# Altium PCB PCB.PcbDoc
Units mm, origin at the board's own origin, x right, y up, seen from the top; angles counter-clockwise.
Board outline 118 x 31 mm, 2 copper layers (Top Layer, Bottom Layer); 24 components, 22 nets, 89 pads, 8 vias.
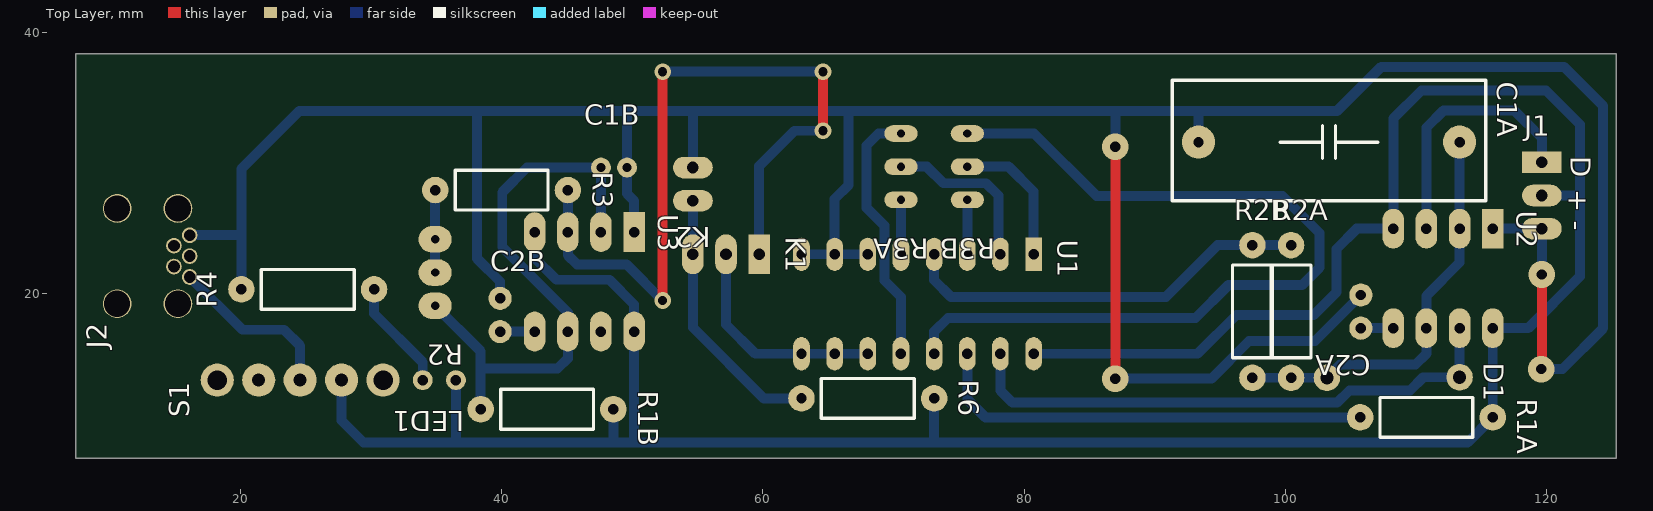
[diagram p0: Top Layer view]
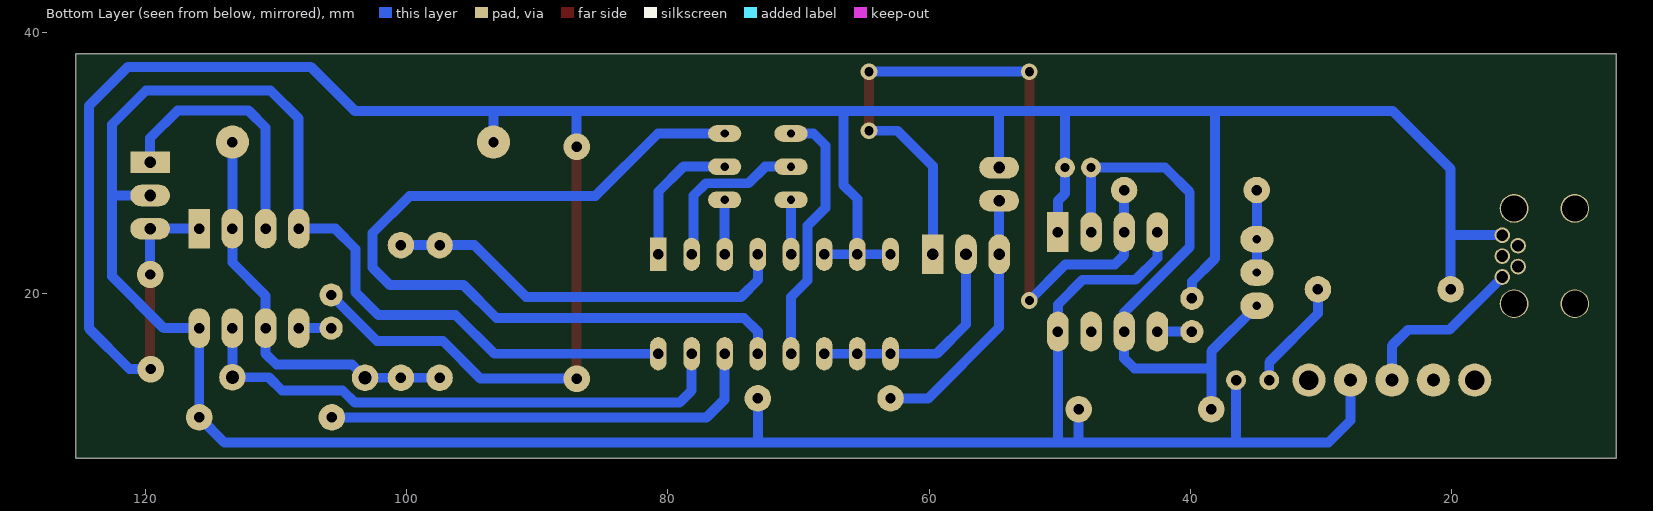
[diagram p1: Bottom Layer view, seen from below]
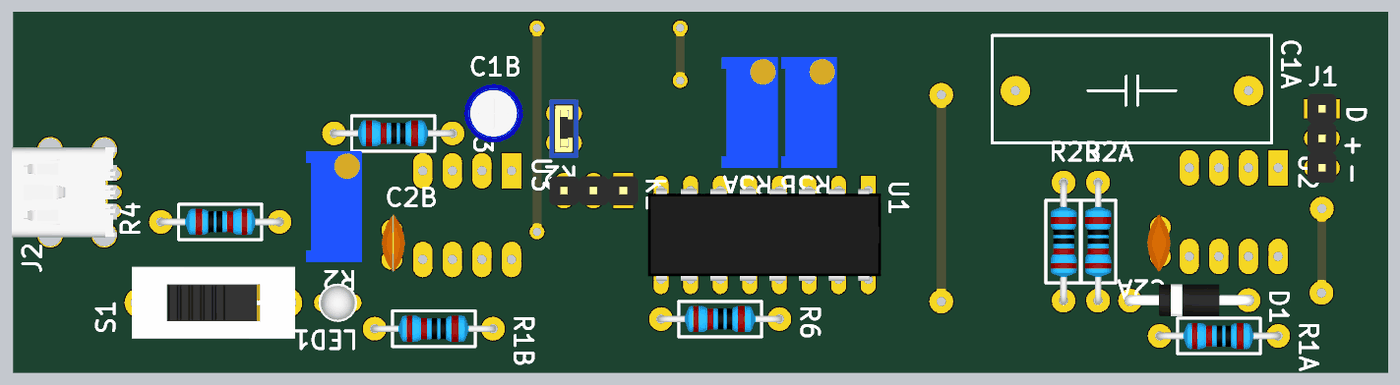
[diagram p2: 3D render of the assembled board from above, using the file's embedded part models]

## Layer stack, top to bottom
Top Solder: solder mask 0.0102, Solder Resist, Dk 3.5
Top Layer: signal copper 0.0356
Dielectric 1: dielectric 0.32, FR-4, Dk 4.8
Bottom Layer: signal copper 0.0356
Bottom Solder: solder mask 0.0102, Solder Resist, Dk 3.5

## Board outline
7.36,7.34 7.36,38.34 125.36,38.34 125.36,7.34

## Design rules (kind name [scope] priority, off if disabled: settings)
Clearance [All] p1: gap=0.254
PolygonConnect [All] p1: connectstyle=Relief reliefconductorwidth=0.254 reliefentries=4 polygonreliefangle="90 Angle" airgapwidth=0.254
RoutingVias [All] p1: holewidth=0.711 width=1.27 viastyle="Through Hole" minholewidth=0.711 minwidth=1.27 maxholewidth=0.711 maxwidth=1.27
SolderMaskExpansion [All] p1: expansion=0.102
Width [All] p1: maxlimit=0.762 minlimit=0.762 preferedwidth=0.762
30 further rules are at their usual default settings.

## Classes and differential pairs
component class PCB: C1A C1B C2A C2B D1 J1 J2 K1 K2 R1A R1B R2 R2A R2B R3 R3A R3B R6 U1 U2 U3

## Components (designator, comment, footprint, x,y, rotation, side; value= is the part's Value field where it differs from the comment)
C1A "CAP-CER" CAP_POL_20MM 103.36,31.57 r0 top
C1B "CAP-ELEC" CAP-ELEC-5x11x2mm 48.59,29.62 r0 top
C2A "CAP-CER" CAP-CER 105.8,18.209 r270 top
C2B "CAP-CER" CAP-CER 39.86,18.711 r90 top
D1 "DIODE" DO-41 107.645,13.523 r0 top
J1 "Servo" "Header 1x3" 119.66,30.02 r0 top
J2 "MINI USB" 5075BMR-05 12.86,22.84 r90 top
K1 "Jumper" "Header 1x3" 59.71,22.98 r270 top
K2 "JUMPER" JUMPER 54.63,28.35 r180 top
LED1 "LED" LED-3MM-GREEN 35.21,13.34 r180 top
R1A "RES" RES-Axial-400mil 105.74,10.49 r0 top
R1B "RES" RES-Axial-400mil 38.38,11.11 r0 top
R2 "POT" TRIMPOT#1 34.89,21.58 r270 top
R2A "RES" RES-Axial-400mil 100.45,13.52 r90 top
R2B "RES" RES-Axial-400mil 97.493,13.52 r90 top
R3 "RES" RES-Axial-400mil 34.9,27.9 r0 top
R3A "POT" TRIMPOT#2 70.57,29.69 r270 top
R3B "POT" TRIMPOT#2 75.65,29.69 r270 top
R4 "RES" RES-Axial-400mil 30.21,20.29 r180 top
R6 "RES" RES-Axial-400mil 62.95,11.94 r0 top
S1 "SLIDE-SWITCH" SWITCH 24.55,13.34 r180 top
U1 "4053" DIP16 80.73,22.98 r270 top
U2 "555" DIP8 115.9,24.94 r270 top
U3 "555" DIP8 50.13,24.68 r270 top

## Footprints (in the part's own frame and the unit in brackets; to place one, negate y for a bottom-side part, rotate by r counter-clockwise, add the part's x,y. Pads: shape width x height; smd on the part's side, far side on the other; paste and mask are expansions set on the pad)
5075BMR-05 [mm]
  round 1.2 hole 0.9: 1(-1.6,-3.225) 2(-0.8,-2.025) 3(0,-3.225) 4(0.8,-2.025) 5(1.6,-3.225)
  round 2.2 hole 2: ""(-3.65,-2.325) ""(-3.65,2.325) ""(3.65,-2.325) ""(3.65,2.325)
  body extent -3.85,-3.4 3.85,5.6, height 3.95
CAP-CER [mil]
  round 70 hole 31.5: 1(-65,0) 2(35,0)
  body extent -107,-44 87,34, height 207
CAP-ELEC-5x11x2mm [mm]
  round 1.524 hole 0.7: 1(-1,0) 2(1,0)
  body extent -2.53,-2.53 2.52,2.53, height 11.53
CAP_POL_20MM [mm]
  round 2.54 hole 0.8: 1(-10,0) 2(10,0)
  silkscreen extent -12,-4.5 12,4.75
DIP8 [mil]
  rect 120x65 hole 31.5: 1(0,0)
  oval 120x65 hole 31.5: 2(0,-100) 3(0,-200) 4(0,-300) 5(300,-300) 6(300,-200) 7(300,-100) 8(300,0)
  body extent -5,-343 305,43, height 155
DIP16 [mm]
  rect 2.54x1.27 hole 0.8: 1(0,0)
  oval 2.54x1.27 hole 0.8: 2(0,-2.54) 3(0,-5.08) 4(0,-7.62) 5(0,-10.16) 6(0,-12.7) 7(0,-15.24) 8(0,-17.78) 9(7.62,-17.78) 10(7.62,-15.24) 11(7.62,-12.7) 12(7.62,-10.16) 13(7.62,-7.62) 14(7.62,-5.08) 15(7.62,-2.54) 16(7.62,0)
  body extent -0.12,-18.89 7.75,1.11, height 5.1
DO-41 [mil]
  round 80 hole 39.37: A(224.99,1.45) K(-175,0)
  body extent -192,-52 242,55, height 107
"Header 1x3" [mil]
  rect 120x65 hole 35.43: 1(0,0)
  oval 120x65 hole 35.43: 2(0,-100) 3(0,-200)
  body extent -49,-250 49,50, height 336
JUMPER [mil]
  oval 120x65 hole 35.43: 1(0,50) 2(0,-50)
  body extent -49,-100 49,100, height 350
LED-3MM-GREEN [mil]
  round 60 hole 31.5: A(-50,0) K(50,0)
  body extent -66,-65 64,65, height 217
RES-Axial-400mil [mil]
  round 80 hole 31.5: 1(0,0) 2(400,0)
  silkscreen extent 60,-60 340,60, body extent -12,-44 410,44, height 94
SWITCH [mm]
  round 2.54 hole 1: 1(-3.175,0) 2(0,0) 3(3.175,0)
  round 2.54 hole 1.5: 4(-6.35,0) 4(6.35,0)
  body extent -7,-3.1 7,3.1, height 9.65
TRIMPOT#1 [mil]
  oval 80x100 hole 25: 1(-100,0) 2(0,0) 3(100,0)
  body extent -188,-94 188,94, height 455
TRIMPOT#2 [mil]
  oval 50x100 hole 25: 1(-100,0) 2(0,0) 3(100,0)
  body extent -188,-94 188,94, height 455

## Part data
J1 K1: library part "Header 1x3"

## Via types
v1: diameter 1.27, hole 0.711, Top Layer to Bottom Layer, 4 vias
v2: diameter 2.032, hole 0.8, Top Layer to Bottom Layer, 4 vias

## Nets (pads, with @x,y where several pads share a name; then routed paths per layer and width w, separated by ;. In a path a pad name is that pad's centre, name@x,y a point inside that pad or via, vN(x,y) a via of type N, cw(c..) or ccw(c..) an arc to the next point about the centre after c; other vN are vias at no path point)
GND: C1A.1 C1B.2 C2A.1 C2B.2 J1.3 J2.5 K2.2 R4.2 U1.6 U1.7 U1.8 U2.1 U3.1 | length 249.4
  Top Layer w0.762: v2(87,13.45) v2(87,31.21) ; v2(119.62,14.19) 119.66,14.23 v2(119.66,21.43)
  Bottom Layer w0.762: J2.5 20.05,24.44 ; R4.2 20.05,24.44 ; C2B.2 39.86,20.89 38.11,22.64 38.11,33.97 ; U3.1 50.13,27.08 49.59,27.62 C1B.2 49.59,33.97 ; K2.2 54.63,33.97 ; U1.8 U1.7 ; U1.6 U1.7 ; v2(87,13.45) 94.35,13.45 97.24,16.34 102.28,16.34 C2A.1 ; v2(87,31.21) 87,33.97 ; C1A.1 93.36,33.97 ; U2.1 J1.3 v2(119.66,21.43) ; v2(119.62,14.19) 121.23,14.19 124.36,17.32 124.36,34.34 121.36,37.34 107.36,37.34 103.99,33.97 93.36,33.97 ; 20.05,24.44 20.05,29.53 24.49,33.97 38.11,33.97 ; 38.11,33.97 49.59,33.97 ; 49.59,33.97 54.63,33.97 ; 54.63,33.97 66.565,33.97 ; U1.7 65.49,27.21 66.565,28.285 66.565,33.97 ; 66.565,33.97 87,33.97 ; 87,33.97 93.36,33.97
NetC1A_2: C1A.2 D1.K R2A.1 R2B.1 U2.2 U2.6 | length 31.4
  Bottom Layer w0.762: R2B.1 R2A.1 103.197,13.52 D1.K 104.207,14.53 109.99,14.53 110.82,15.36 U2.6 110.82,19.8 113.36,22.34 U2.2 C1A.2
NetC1B_1: C1B.1 R1B.1 R2.3 U3.2 U3.6 | length 44.5
  Bottom Layer w0.762: R2.3 38.38,15.55 38.38,14.223 ; R1B.1 38.38,14.223 ; U3.2 C1B.1 41.92,29.62 40.03,27.73 40.03,23.53 45.05,18.51 U3.6 45.05,15 44.273,14.223 38.38,14.223
NetC2A_2: C2A.2 U2.5 | length 2.5
  Bottom Layer w0.762: C2A.2 U2.5
NetC2B_1: C2B.1 U3.5 | length 2.7
  Bottom Layer w0.762: C2B.1 U3.5
NetJ2_1: J2.1 S1.2 | length 13.3
  Bottom Layer w0.762: J2.1 20.125,17.2 23.32,17.2 24.55,15.97 S1.2
NetK1_3: K1.3 K2.1 R6.1 | length 20.3
  Bottom Layer w0.762: K2.1 K1.3 54.63,17.37 60.06,11.94 R6.1
NetLED1_K: LED1.K R4.1 | length 8.5
  Bottom Layer w0.762: R4.1 30.21,18.44 33.94,14.71 LED1.K
NetR2_1: R2.1 R2.2 R3.1 | length 6.3
  Bottom Layer w0.762: R2.2 R2.1 34.89,27.89 R3.1
OUT: K1.1 R3.2 U3.3 | length 60.8
  Top Layer w0.762: v1(52.31,19.44) v1(52.31,36.97) ; v1(64.6,32.44) v1(64.6,36.97)
  Bottom Layer w0.762: R3.2 45.06,24.69 U3.3 45.05,22.91 45.75,22.21 49.54,22.21 v1(52.31,19.44) ; v1(52.31,36.97) v1(64.6,36.97) ; K1.1 59.71,29.74 62.41,32.44 v1(64.6,32.44)
POT1A: R3A.1 U1.12 | length 20.1
  Bottom Layer w0.762: U1.12 70.57,19.71 69.3,20.98 69.3,25.17 67.93,26.54 67.93,31.3 68.86,32.23 R3A.1
POT1B: R3A.2 U1.2 | length 12.9
  Bottom Layer w0.762: R3A.2 72.55,29.69 73.82,28.42 77.09,28.42 78.04,27.47 78.04,23.13 U1.2
POT1C: R3A.3 U1.5 | length 4.2
  Bottom Layer w0.762: U1.5 R3A.3
POT2A: R3B.1 U1.13 | length 66
  Bottom Layer w0.762: U1.13 73.11,17.05 74.17,18.11 93.14,18.11 95.64,20.61 101.28,20.61 102.62,21.95 102.62,24.6 99.78,27.44 85.56,27.44 80.77,32.23 R3B.1
POT2B: R3B.2 U1.1 | length 10.7
  Bottom Layer w0.762: R3B.2 78.82,29.69 80.73,27.78 U1.1
POT2C: R3B.3 U1.3 | length 4.2
  Bottom Layer w0.762: U1.3 R3B.3
POTA: R1A.1 U1.14 | length 34.2
  Bottom Layer w0.762: U1.14 75.65,11.87 77.03,10.49 R1A.1
POTB: D1.A U1.15 U2.7 | length 42.9
  Bottom Layer w0.762: U1.15 78.19,12.53 79.1,11.62 103.99,11.62 104.92,12.55 109.56,12.55 110.57,13.56 D1.A U2.7
POTC: R2A.2 R2B.2 U1.4 | length 31.5
  Bottom Layer w0.762: U1.4 73.11,21 74.39,19.72 90.87,19.72 94.83,23.68 R2B.2 R2A.2
SELECT: K1.2 U1.9 U1.10 U1.11 | length 17.2
  Bottom Layer w0.762: K1.2 57.17,17.6 59.41,15.36 U1.9 U1.10 U1.11
SERVO: J1.1 U2.3 | length 19.9
  Bottom Layer w0.762: U2.3 110.82,32.69 112.11,33.98 117.56,33.98 119.66,31.88 J1.1
VCC: J1.2 LED1.A R1A.2 R1B.2 R6.2 S1.1 U1.16 U2.4 U2.8 U3.4 U3.8 | length 213
  Bottom Layer w0.762: S1.1 27.725,10.235 29.39,8.57 36.48,8.57 ; LED1.A 36.48,8.57 ; U3.4 42.51,22.7 44.18,21.03 48.24,21.03 50.13,19.14 U3.8 50.13,8.57 ; R1B.2 48.54,8.57 ; R6.2 73.11,8.57 ; U1.16 93.28,15.36 96.26,18.34 102.19,18.34 103.92,20.07 103.92,23.38 105.48,24.94 U2.4 108.28,33.37 110.43,35.52 119.99,35.52 122.59,32.92 122.59,27.48 ; J1.2 122.59,27.48 ; 36.48,8.57 48.54,8.57 ; 48.54,8.57 50.13,8.57 ; 50.13,8.57 73.11,8.57 ; 73.11,8.57 113.98,8.57 R1A.2 U2.8 118.62,17.32 122.59,21.29 122.59,27.48
pads on no net: J2. J2.2 J2.3 J2.4 S1.3 S1.4 U3.7

## Silkscreen, mask and mechanical layers (free items; w line width, h text height)
Top Overlay:
  text "D" at 121.86,30.48 h1.52 r270
  text "+" at 121.71,27.97 h1.52 r270
  text "-" at 121.64,25.55 h1.52 r270
Mechanical 1:
  the board outline again, w0.254